# EAGLE board familamp (EAGLE 7.6.0)
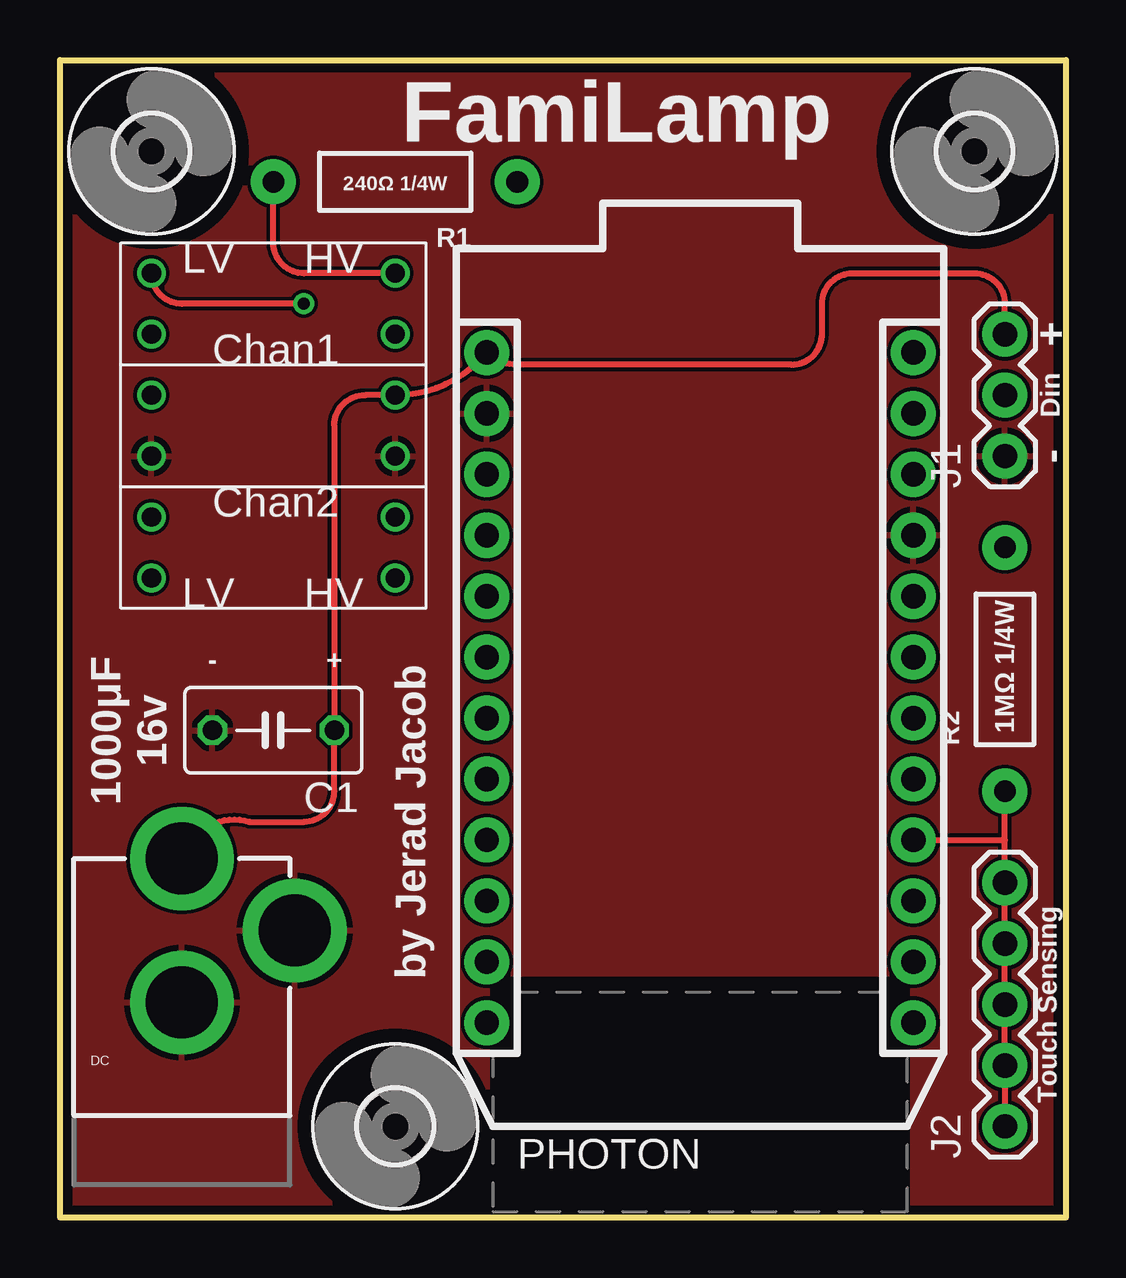
[diagram p0: board, top side]
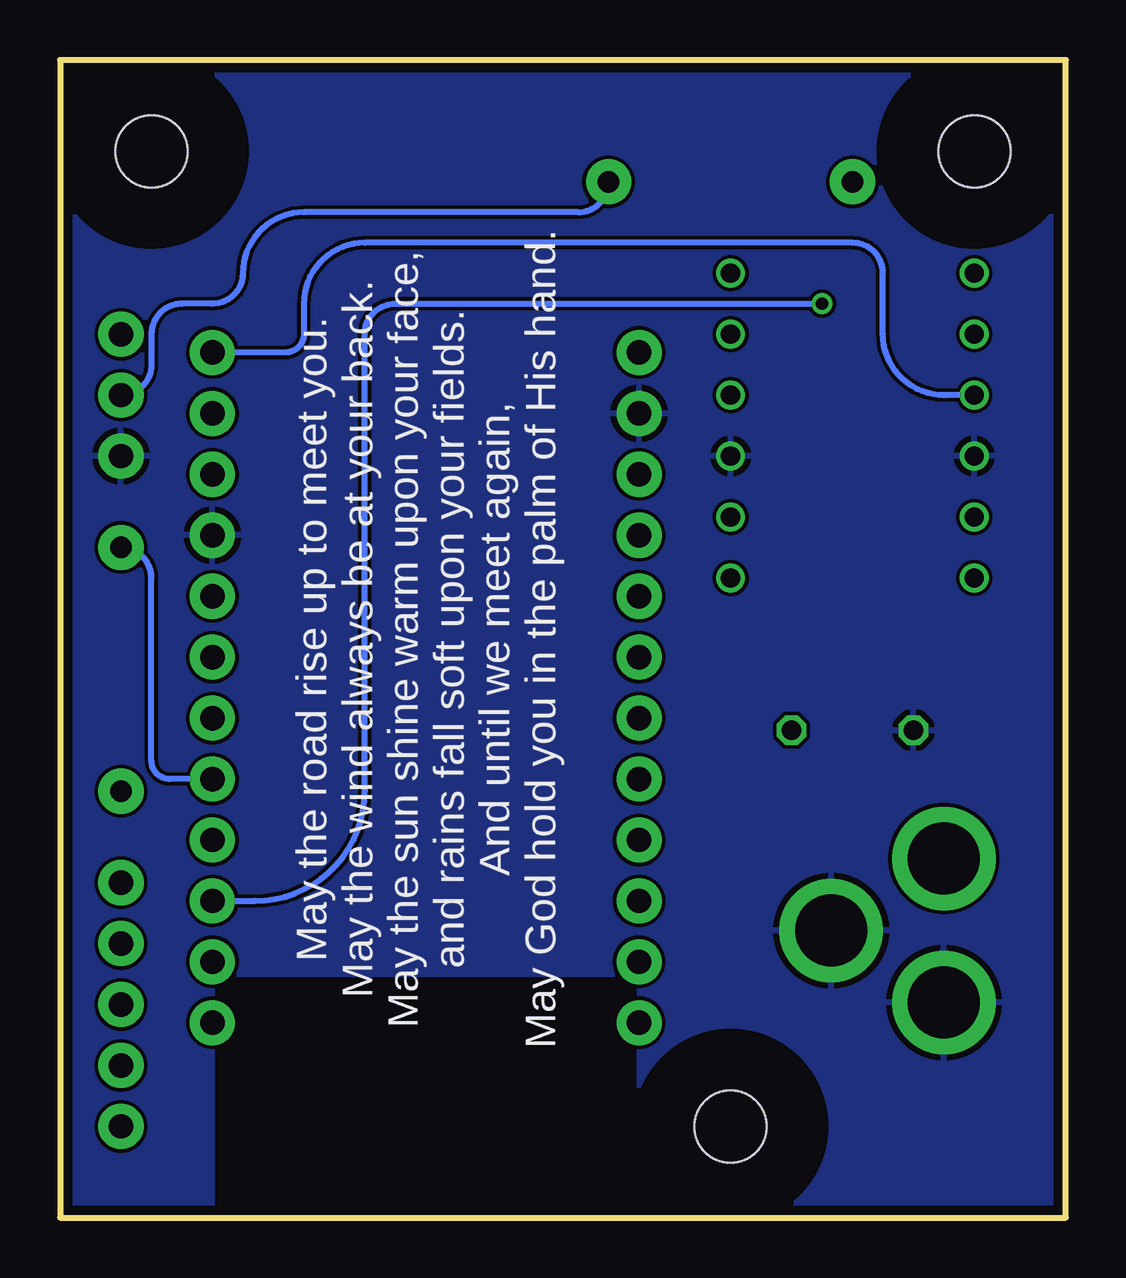
[diagram p1: board, bottom side, seen from below]

Size 41.91 x 48.26 mm. Coordinates in mm from the lower left corner, seen from the top.
Outline: 0,0 0,48.26 41.91,48.26 41.91,0 0,0
Copper layers (1*16): Top 0.0356mm / dielectric 1.5011mm / Bottom 0.0356mm
Design rules "oshpark-2layer": minimum track width 6mil, minimum drill 13mil, track to track 6mil, track to pad 6mil, pad to pad 6mil, via to via 6mil, smd to smd 6mil, copper to edge 15mil, drill to drill 6mil, minimum pad ring 7mil, minimum via ring 7mil, stop-mask expansion 2.5mil, vias tented up to drill 0mil, thermal gap 10mil

## Footprints (pad centres in the part's own frame; a part is rotated, then mirrored left to right if it is on the bottom)
C050-035X075 = drill 0.813 octagon: 1 -2.54,0; 2 2.54,0
POWER_JACK_PTH = drill 2.997 pad 4.318: GND 0,7.7; GNDBREAK 4.7,10.7; PWR 0,13.7
1X03 = drill 1.016 pad 1.88: 1 0,0; 2 2.54,0; 3 5.08,0
1X05 = drill 1.016 pad 1.88: 1 0,0; 2 2.54,0; 3 5.08,0; 4 7.62,0; 5 10.16,0
PHOTON = drill 1.016 pad 1.88: 1 1.27,32.258; 2 1.27,29.718; 3 1.27,27.178; 4 1.27,24.638; 5 1.27,22.098; 6 1.27,19.558; 7 1.27,17.018; 8 1.27,14.478; 9 1.27,11.938; 10 1.27,9.398; 11 1.27,6.858; 12 1.27,4.318; 13 19.05,4.318; 14 19.05,6.858; 15 19.05,9.398; 16 19.05,11.938; 17 19.05,14.478; 18 19.05,17.018; 19 19.05,19.558; 20 19.05,22.098; 21 19.05,24.638; 22 19.05,27.178; 23 19.05,29.718; 24 19.05,32.258
AXIAL-0.4 = drill 0.9 pad 1.88: P$1 -5.08,0; P$2 5.08,0
LOGIC_LEVEL_CONVERTER = drill 0.8: P$1 1.27,13.97; P$2 1.27,11.43; P$3 1.27,8.89; P$4 1.27,6.35; P$5 1.27,3.81; P$6 1.27,1.27; P$7 11.43,1.27; P$8 11.43,3.81; P$9 11.43,6.35; P$10 11.43,8.89; P$11 11.43,11.43; P$12 11.43,13.97
3,0 = hole 3: 0,0

## Placement (x,y rotation side)
C1  [C050-035X075]  8.89,20.32 180 top
DC  POWER_JACKPTH  [POWER_JACK_PTH]  5.08,1.27 0 top
FRAME1  FRAME-LETTER  [CREATIVE_COMMONS]  -101.6,44.45 0 top  (outside the outline)
J1  [1X03]  39.37,31.75 90 top
J2  [1X05]  39.37,3.81 90 top
PHOTON  PHOTON_WITH_HEADERS  [PHOTON]  16.51,3.81 0 top
R1  [AXIAL-0.4]  13.97,43.18 180 top
R2  [AXIAL-0.4]  39.37,22.86 90 top
U$2  LOGIC_LEVEL_CONVERTER  [LOGIC_LEVEL_CONVERTER]  2.54,25.4 0 top
U$3  [3,0]  3.81,44.45 0 top
U$4  [3,0]  38.1,44.45 0 top
U$5  [3,0]  13.97,3.81 0 top

## Library data of the parts
C1 = rcl
DC = SparkFun-Connectors; PROD_ID: CONN-08197
FRAME1 = SparkFun-Aesthetics
J1 J2 = SparkFun-Connectors
PHOTON = particle-photon
R1 = SparkFun-Passives
R2 = SparkFun-Resistors
U$2 = SparkFun-Boards
U$3-U$5 = holes

## Nets
3.3V: PHOTON.24 U$2.P$3
GND: C1.2 DC.GND DC.GNDBREAK J1.1 PHOTON.2 PHOTON.21 U$2.P$4 U$2.P$9
N$2: J1.2 R1.P$1
N$5: PHOTON.17 R2.P$2
NEOHV: R1.P$2 U$2.P$12
NEOLV: PHOTON.15 U$2.P$1
TOUCH: J2.1 J2.2 J2.3 J2.4 J2.5 PHOTON.16 R2.P$1
VBAT: PHOTON.22
VCC: C1.1 DC.PWR J1.3 PHOTON.1 U$2.P$10

## Tracks (layer width: path | path; a pad name or v marks a point on that pad's centre or on a via)
3.3V
  Bottom 0.254: U$2.P$3 5.08,34.29 arc90 7.62,36.83 7.62,39.37 arc-90 8.89,40.64 29.21,40.64 arc-90 31.75,38.1 31.75,36.83 arc90 32.51,36.07 PHOTON.24
GND
  pour Bottom: 0,0 0,48.26 41.91,48.26 41.91,0 35.56,0 35.56,10.16 17.78,10.16 17.78,0
  pour Top: 0,0 0,48.26 41.91,48.26 41.91,0 35.56,0 35.56,10.16 17.78,10.16 17.78,0
N$2
  Bottom 0.254: J1.2 arc-90 38.1,35.56 38.1,36.83 arc90 36.83,38.1 35.56,38.1 arc-90 34.29,39.37 arc90 31.75,41.91 20.32,41.91 arc-90 R1.P$1
N$5
  Bottom 0.254: PHOTON.17 37.34,18.29 arc90 38.1,19.05 38.1,26.67 arc-90 R2.P$2
NEOHV
  Top 0.254: U$2.P$12 10.16,39.37 arc-90 8.89,40.64 R1.P$2
NEOLV  (via drill 0.51)
  Top 0.254: v10.16,38.1 5.08,38.1 arc-90 U$2.P$1
  Bottom 0.254: PHOTON.15 33.78,13.21 arc-90 29.21,17.78 29.21,36.83 arc90 27.94,38.1 v10.16,38.1
TOUCH
  Top 0.254: PHOTON.16 39.37,15.75 | 39.37,15.75 R2.P$1 | 39.37,15.75 J2.5 J2.4 J2.3 J2.2 J2.1
VCC
  Top 0.254: J1.3 39.37,38.1 arc90 38.1,39.37 33.02,39.37 arc90 31.75,38.1 31.75,36.83 arc-90 30.48,35.56 19.05,35.56 arc-44 PHOTON.1 arc-50 U$2.P$10 12.7,34.29 arc90 11.43,33.02 C1.1 11.43,17.78 arc-90 10.16,16.51 7.89,16.51 arc90 DC.PWR

## Text on the board
tPlace: FamiLamp | 240Ω 1/4W | + | Din | - | - | + | 1MΩ 1/4W | 1000μF / 16v | by Jerad Jacob | Touch Sensing
bPlace: May the road rise up to meet you. / May the wind always be at your back. / May the sun shine warm upon your face, / and rains fall soft upon your fields. / And until we meet again, / May God hold you in the palm of His hand.
tOrigins: 5VDC 2A
tDocu: Jerad Jacob